# Altium PCB PCB1.PcbDoc
Units mil, origin at the board's own origin, x right, y up, seen from the top; angles counter-clockwise.
Board outline not stored, 2 copper layers (Top Layer, Bottom Layer); 79 components, 65 nets, 339 pads, 0 vias.
Unrouted connection lines stored in the file: 203.
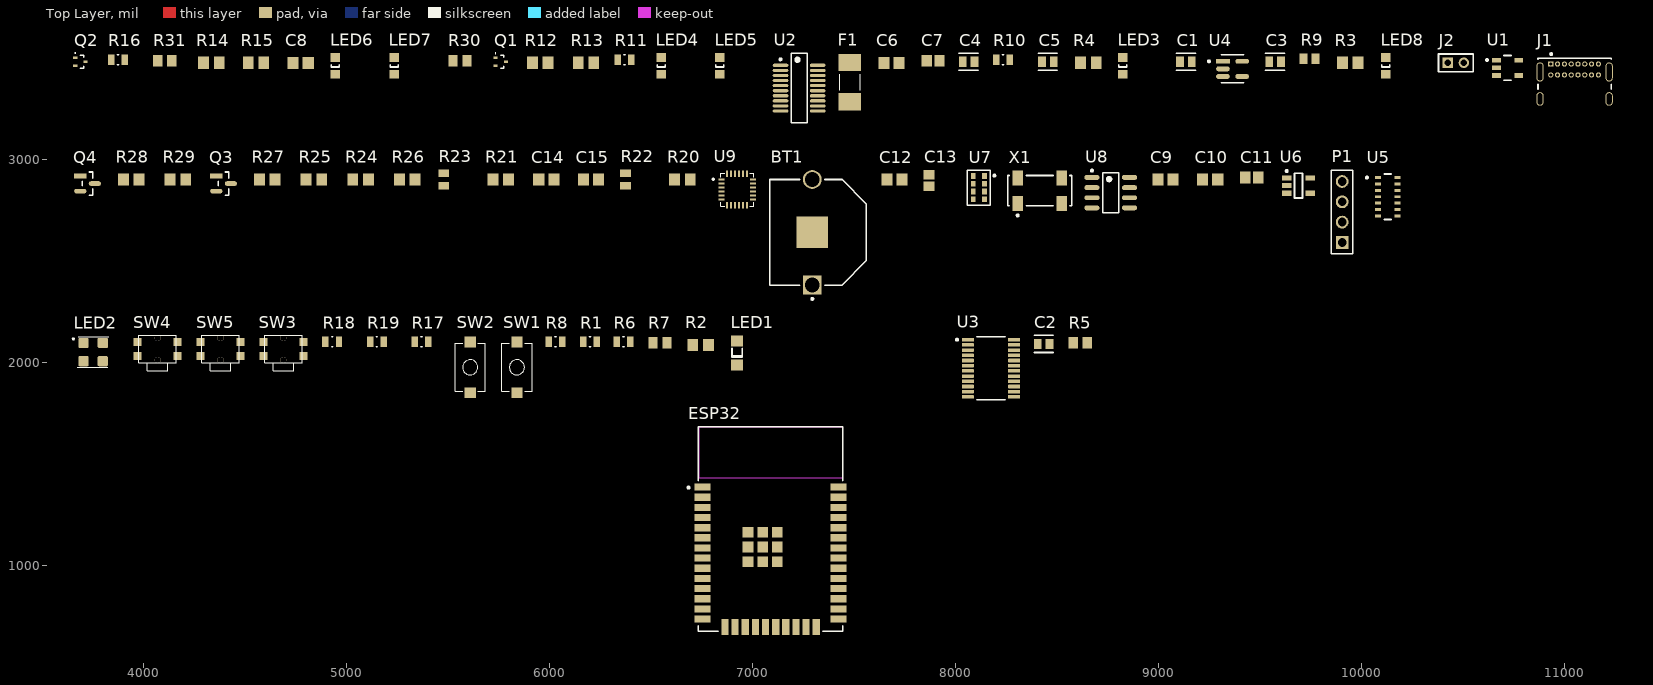
[diagram p0: Top Layer view]
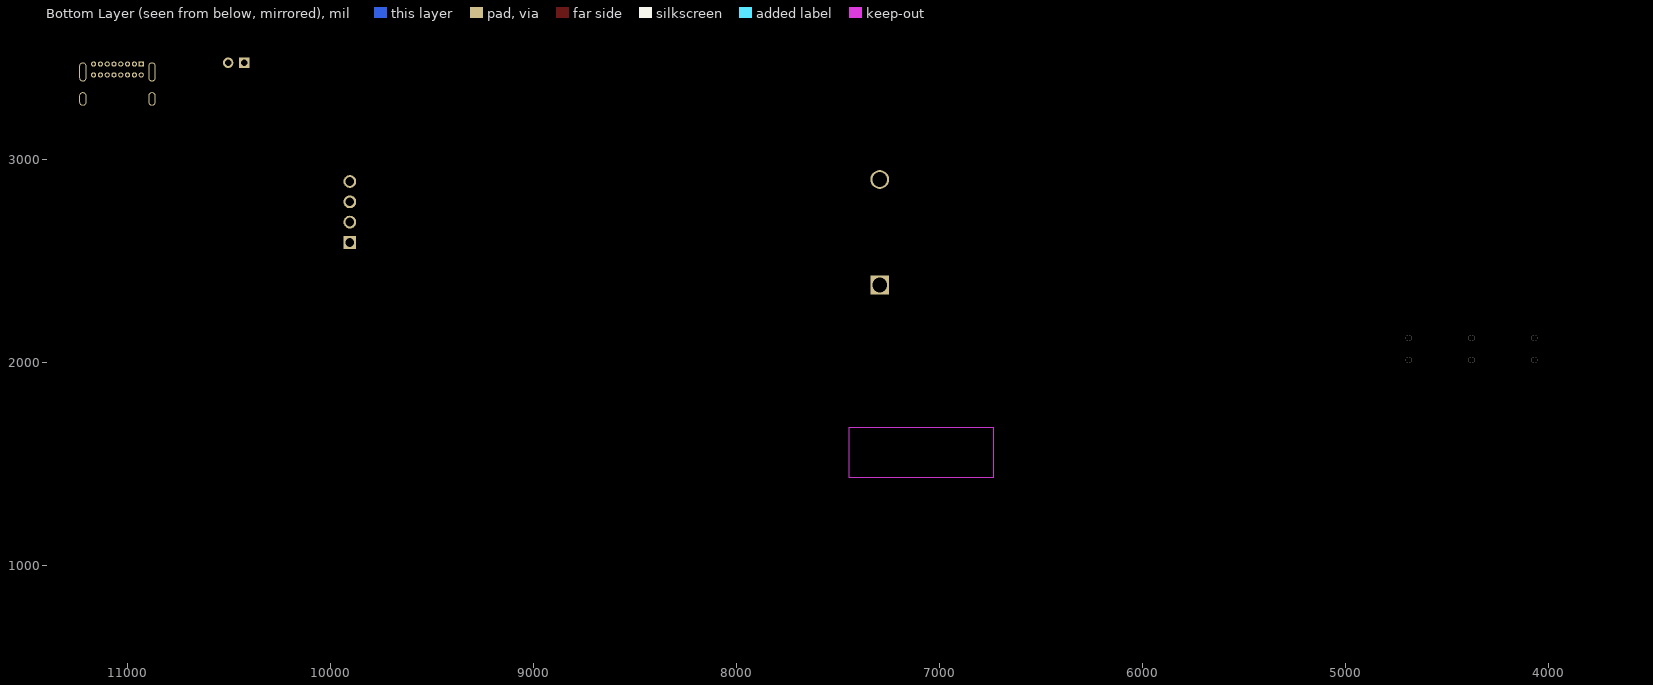
[diagram p1: Bottom Layer view, seen from below]

## Layer stack, top to bottom
Top Solder: solder mask 0.4, Solder Resist, Dk 3.5
Top Layer: signal copper 1.4
Dielectric 1: dielectric 12.6, FR-4, Dk 4.8
Bottom Layer: signal copper 1.4
Bottom Solder: solder mask 0.4, Solder Resist, Dk 3.5

## Design rules (kind name [scope] priority, off if disabled: settings)
Clearance [All] p1: gap=10 ignorepadtopadclearanceinfootprint=FALSE except(0: Arc-Hole Track-Hole SMDPad-Hole THPad-Hole Via-Hole Fill-Hole Poly-Hole Region-Hole Text-Hole)
PolygonConnect [All] p1: connectstyle=Relief reliefconductorwidth=10 reliefentries=4 polygonreliefangle="90 Angle" airgapwidth=10
RoutingVias [All] p1: holewidth=28 width=50 viastyle="Through Hole" minholewidth=28 minwidth=50 maxholewidth=28 maxwidth=50
SolderMaskExpansion [All] p1: expansion=4 istentingtop=FALSE
Width [All] p1: maxlimit=10 minlimit=10 preferedwidth=10
30 further rules are at their usual default settings.

## Components (designator, comment, footprint, x,y, rotation, side; value= is the part's Value field where it differs from the comment)
BT1 "3001" KSTN-3001_V 7295,2641.61 r90 top
C1 "10uf" FP-GRM21B-0_1-IPC_C 9135,3481.61 r0 top
C2 "10uf" FP-GRM21B-0_1-IPC_C 8435,2091.61 r0 top
C3 "10uf" FP-GRM21B-0_1-IPC_C 9575,3481.61 r0 top
C4 "10uf" FP-GRM21B-0_1-IPC_C 8065,3481.61 r0 top
C5 "10uf" FP-GRM21B-0_1-IPC_C 8455,3481.61 r0 top
C6 "0.1uf" CAPC2013X135X45ML10T25 7685,3476.61 r0 top
C7 "4.7uf" CAPC2013X140X50NL20T25 7890,3486.61 r0 top
C8 "0.1uf" CAPC2013X135X45ML10T25 4775,3476.61 r0 top
C9 "0.1uf" CAPC2013X135X45ML10T25 9035,2901.61 r0 top
C10 "0.1uf 0805" CAPC2013X135X45ML10T25 9255,2901.61 r0 top
C11 "4.7uf 0805" CAPC2013X140X50NL20T25 9460,2911.61 r0 top
C12 "0.1uf" CAPC2013X135X45ML10T25 7700,2901.61 r0 top
C13 "2.2nF 5% 0805" CAPC2013X94X50LL20T25 7870,2896.61 r90 top
C14 "0.1uf 10% 0805" CAPC2013X135X45ML10T25 5985,2901.61 r0 top
C15 "0.1uf 10% 0805" CAPC2013X135X45ML10T25 6205,2901.61 r0 top
ESP32 "ESP32-WROOM-32D" FP-ESP32-WROOM-32D-MFG 7089.65,1179.53 r0 top
F1 "500mA 125VAC/DC" FUSE 7480,3381.61 r90 top
J1 "USB4085-GF-A" FP-USB4085-GF-A-MFG 11050,3311.61 r0 top
J2 "M22-2510205" FP-M22-2510205-MFG 10465,3476.61 r0 top
LED1 "150120GS75000_GREEN" 1206_A 6925,2046.61 r90 top
LED2 "4492" "LED adafruit" 3755,2051.61 r0 top
LED3 "150080GS75000_GREEN" 0805_A 8825,3461.61 r90 top
LED4 "150080GS75000_GREEN" 0805_A 6550,3461.61 r90 top
LED5 "150080GS75000_GREEN" 0805_A 6840,3461.61 r90 top
LED6 "150080GS75000_GREEN" 0805_A 4945,3461.61 r90 top
LED7 "150080GS75000_GREEN" 0805_A 5235,3461.61 r90 top
LED8 "150080SS75000_RED" 0805_A 10120,3461.61 r90 top
P1 "OLED SCREEN HEADER" 61300411121 9905,2741.61 r90 top
Q1 "MMBT2222ATT1G" ONSC-SC-75-3-463-01_V 5760,3481.61 r0 top
Q2 "MMBT2222ATT1G" ONSC-SC-75-3-463-01_V 3690,3481.61 r0 top
Q3 "BSS138" FP-318-08-IPC_B 4395,2881.61 r0 top
Q4 "BSS138" FP-318-08-IPC_B 3725,2881.61 r0 top
R1 "10K 5% 0805" FP-CRCW0805-e3-IPC_C 6200,2101.61 r0 top
R2 "1K 0805" RESC2013X70X40ML20T20 6745,2086.61 r0 top
R3 "470ohm" RESC2013X70X40ML20T20 9945,3476.61 r0 top
R4 "470ohm" RESC2013X70X40ML20T20 8655,3476.61 r0 top
R5 "1.5K 5% 0805" RESC2013X70X40NL20T20 8615,2096.61 r0 top
R6 "10K 5% 0805" FP-CRCW0805-e3-IPC_C 6365,2101.61 r0 top
R7 "1.5K 5% 0805" RESC2013X70X40NL20T20 6545,2096.61 r0 top
R8 "10K 5% 0805" FP-CRCW0805-e3-IPC_C 6030,2101.61 r0 top
R9 "1.5Kohm" RESC2013X60X40LL20T25 9745,3496.61 r0 top
R10 "10K 5% 0805" FP-CRCW0805-e3-IPC_C 8235,3491.61 r0 top
R11 "10K 5% 0805" FP-CRCW0805-e3-IPC_C 6370,3491.61 r0 top
R12 "330ohm 5% 0805" RESC2013X70X40ML20T20 5955,3476.61 r0 top
R13 "1K 0805" RESC2013X70X40ML20T20 6180,3476.61 r0 top
R14 "330ohm 5% 0805" RESC2013X70X40ML20T20 4335,3476.61 r0 top
R15 "1K 0805" RESC2013X70X40ML20T20 4555,3476.61 r0 top
R16 "10K 5% 0805" FP-CRCW0805-e3-IPC_C 3875,3491.61 r0 top
R17 "10K 5% 0805" FP-CRCW0805-e3-IPC_C 5370,2101.61 r0 top
R18 "10K 5% 0805" FP-CRCW0805-e3-IPC_C 4930,2101.61 r0 top
R19 "10K 5% 0805" FP-CRCW0805-e3-IPC_C 5150,2101.61 r0 top
R20 "4.7K 5% 0805" RESC2013X70X40ML20T20 6655,2901.61 r0 top
R21 "4.7K 5% 0805" RESC2013X70X40ML20T20 5760,2901.61 r0 top
R22 "2.2K 5% 0805" RESC2013X70X40LL20T20 6375,2901.61 r90 top
R23 "2.2K 5% 0805" RESC2013X70X40LL20T20 5480,2901.61 r90 top
R24 "4.7K 5% 0805" RESC2013X70X40ML20T20 5070,2901.61 r0 top
R25 "4.7K 5% 0805" RESC2013X70X40ML20T20 4840,2901.61 r0 top
R26 "4.7K 5% 0805" RESC2013X70X40ML20T20 5300,2901.61 r0 top
R27 "4.7K 5% 0805" RESC2013X70X40ML20T20 4610,2901.61 r0 top
R28 "4.7K 5% 0805" RESC2013X70X40ML20T20 3940,2901.61 r0 top
R29 "4.7K 5% 0805" RESC2013X70X40ML20T20 4170,2901.61 r0 top
R30 "5.1Kohm 5% 0805" RESC2013X70X40NL20T20 5560,3486.61 r0 top
R31 "5.1Kohm 5% 0805" RESC2013X70X40NL20T20 4105,3486.61 r0 top
SW1 "RESET_BUTTON" 434113025826 5840,1976.61 r90 top
SW2 "BOOT_BUTTON" 434113025826 5610,1976.61 r90 top
SW3 "436353045816" 436353045816 4690,2066.61 r0 top
SW4 "436353045816" 436353045816 4070,2066.61 r0 top
SW5 "436353045816" 436353045816 4380,2066.61 r0 top
U1 "MCP73832T-2ACI/OT" FP-C04-091-OT-MFG 10720,3451.61 r0 top
U2 "FT231XS-U" SSOP-20_L 7230,3351.61 r0 top
U3 "TCA9548APWR" FP-PW0024A-MFG 8175,1971.61 r0 top
U4 "AP2112K-3.3TRG1" FP-SOT25-IPC_A 9365,3446.61 r0 top
U5 "MAX30102EFD+" FP-F143A5-1-MFG 10130,2816.61 r0 top
U6 "LP2985-18DBVR" DBV0005A_M 9690,2871.61 r0 top
U7 "APDS-9960" FP-APDS-9960-MFG 8115,2861.61 r0 top
U8 "DS1307Z+" S8+2_L 8765,2836.61 r0 top
U9 "MPU-6050" MPU-6050 6925,2856.61 r0 top
X1 "32.768KHZ" ABRA-ABS25-4_V 8415,2846.61 r0 top

## Footprints (in the part's own frame and the unit in brackets; to place one, negate y for a bottom-side part, rotate by r counter-clockwise, add the part's x,y. Pads: shape width x height; smd on the part's side, far side on the other; paste and mask are expansions set on the pad)
0805_A [mm] "Chip LED, 2-Leads, Body 2.0x1.3mm, IPC Medium Density"
  rect 1.1x1.2 smd: 1(-1.05,0) 2(1.05,0)
  silkscreen extent -0.15,-0.5 0.15,0.5, body extent -1,-0.62 1,0.63, height 0.68
1206_A [mm] "Chip LED, 2-Leads, Body 3.2x1.6mm, IPC Medium Density"
  rect 1.4x1.5 smd: 1(-1.5,0) 2(1.5,0)
  silkscreen extent -0.5,-0.67 0.6,0.65, body extent -1.6,-0.8 1.6,0.8, height 0.68
61300411121 [mm] "Pin Header, pitch 2.54 mm, THT, Vertical, single row, 4p"
  rect 1.6x1.6 hole 1.1: 1(-3.81,0)
  round 1.6 hole 1.1: 2(-1.27,0) 3(1.27,0) 4(3.81,0)
  silkscreen extent -5.23,-1.35 5.23,1.35, body extent -5.08,-1.27 5.08,1.27, height 8.57
434113025826 [mm] "6.0*3.8mm vertical type, J-Bend SMD, height 2.5mm, white actuator, 260gf, T&R"
  rect 1.35x1.4 smd: 1(-3.175,0) 2(3.175,0)
  silkscreen extent -3,-1.9 3,1.9, body extent -3.5,-1.95 3.5,1.95, height 2.5
436353045816 [mm] "4.7*3.5mm side push type, J-Bend SMD with boss design,  height 1.65mm, white actuator, 160gf, T&R"
  rect 1x1 smd: 1(2.5,0.85) 2(2.5,-0.85) 3(-2.5,0.85) 4(-2.5,-0.85)
  round 0.75 hole 0.75 unplated: ""(0,-1.375) ""(0,1.375)
  silkscreen extent -2.35,-2.75 2.35,1.75, body extent -2.75,-2.75 2.75,1.75, height 1.65
ABRA-ABS25-4_V [mm] "SMD, 4-Leads, Body 8x3.8mm, Pitch 5.5mm, Height 2.5mm"
  rect 1.3x1.9 smd: 1(-2.75,-1.6) 2(2.75,-1.6) 3(2.75,1.6) 4(-2.75,1.6)
  silkscreen extent -4,-3.22 4,1.9, body extent -4,-2 4,2, height 2.66
CAPC2013X94X50LL20T25 [mm] "Chip Capacitor, 2-Leads, Body 2.01x1.25mm, IPC High Density"
  rect 1.15x1.35 smd: 1(-0.725,0) 2(0.725,0)
  body extent -1.1,-0.72 1.1,0.72, height 0.94
CAPC2013X135X45ML10T25 [mm] "Chip Capacitor, 2-Leads, Body 2.10x1.35mm, IPC Low Density"
  rect 1.4x1.5 smd: 1(-0.95,0) 2(0.95,0)
  body extent -1.05,-0.67 1.05,0.67, height 1.35
CAPC2013X140X50NL20T25 [mm] "Chip Capacitor, 2-Leads, Body 2.00x1.25mm, IPC Medium Density"
  rect 1.3x1.45 smd: 1(-0.8,0) 2(0.8,0)
  body extent -1.1,-0.72 1.1,0.72, height 1.4
DBV0005A_M [mm] "SOT23, 5-Leads, Body 3.05x1.75mm, Pitch 0.95mm, IPC Low Density"
  rrect15% 1.2x0.65 smd: 1(-1.475,0.95) 2(-1.475,0) 3(-1.475,-0.95) 4(1.475,-0.95) 5(1.475,0.95)
  silkscreen extent -1.6,-1.55 0.5,1.95, body extent -1.42,-1.46 1.42,1.46, height 1.08
FP-318-08-IPC_B [mm]
  rect 1.524x0.578 smd paste+0 mask+0: 1(-0.91,0.95)
  rrect100% 1.524x0.578 smd paste+0 mask+0: 2(-0.91,-0.95) 3(0.91,0)
  silkscreen extent -0.65,-1.45 0.65,1.45, body extent -1.92,-1.7 1.92,1.7, height 0.25
FP-APDS-9960-MFG [mm]
  rect 0.6x0.72 smd paste+0 mask+0: 1(0.7,1.455) 2(0.7,0.485) 3(0.7,-0.485) 4(0.7,-1.455) 5(-0.7,-1.455) 6(-0.7,-0.485) 7(-0.7,0.485) 8(-0.7,1.455)
  silkscreen extent -1.42,-2.19 2.07,2.19, body extent -1.38,-2.17 1.38,2.17, height 0.25
FP-C04-091-OT-MFG [mm]
  rect 1.1x0.6 smd paste+0 mask+0: 1(-1.4,0.95) 2(-1.4,0) 3(-1.4,-0.95) 4(1.4,-0.95) 5(1.4,0.95)
  silkscreen extent -2.7,-1.55 0.48,1.55, body extent -2.05,-1.9 2.05,1.9, height 0.25
FP-CRCW0805-e3-IPC_C [mil]
  rect 31.75x51.5 smd paste+0 mask+0: 1(-33.5,0) 2(33.5,0)
  silkscreen extent -3,-25 3,25, body extent -53,-31 53,31, height 10
FP-ESP32-WROOM-32D-MFG [mm]
  rect 2x0.9 smd paste+0 mask+0: 1(-8.5,5.26) 2(-8.5,3.99) 3(-8.5,2.72) 4(-8.5,1.45) 5(-8.5,0.18) 6(-8.5,-1.09) 7(-8.5,-2.36) 8(-8.5,-3.63) 9(-8.5,-4.9) 10(-8.5,-6.17) 11(-8.5,-7.44) 12(-8.5,-8.71) 13(-8.5,-9.98) 14(-8.5,-11.25) 25(8.5,-11.25) 26(8.5,-9.98) 27(8.5,-8.71) 28(8.5,-7.44) 29(8.5,-6.17) 30(8.5,-4.9) 31(8.5,-3.63) 32(8.5,-2.36) 33(8.5,-1.09) 34(8.5,0.18) 35(8.5,1.45) 36(8.5,2.72) 37(8.5,3.99) 38(8.5,5.26)
  rect 0.9x2 smd paste+0 mask+0: 15(-5.715,-12.25) 16(-4.445,-12.25) 17(-3.175,-12.25) 18(-1.905,-12.25) 19(-0.635,-12.25) 20(0.635,-12.25) 21(1.905,-12.25) 22(3.175,-12.25) 23(4.445,-12.25) 24(5.715,-12.25)
  rect 1.33x1.33 smd paste+0 mask+0: 39(-2.835,-4.075) 39(-2.835,-2.24) 39(-2.835,-0.405) 39(-1,-4.075) 39(-1,-2.24) 39(-1,-0.405) 39(0.835,-4.075) 39(0.835,-2.24) 39(0.835,-0.405)
  Keep-Out Layer region: -9,6.45 9,6.45 9,12.75 -9,12.75
  Keep-Out Layer region: -9,6.45 9,6.45 9,12.75 -9,12.75
  silkscreen extent -10.4,-12.8 9.05,12.8, body extent -9.6,-13.35 9.6,12.9, height 0.25
FP-F143A5-1-MFG [mm]
  rect 0.75x0.35 smd paste+0 mask+0: 1(-1.2,2.4) 2(-1.2,1.6) 3(-1.2,0.8) 4(-1.2,0) 5(-1.2,-0.8) 6(-1.2,-1.6) 7(-1.2,-2.4) 8(1.2,-2.4) 9(1.2,-1.6) 10(1.2,-0.8) 11(1.2,0) 12(1.2,0.8) 13(1.2,1.6) 14(1.2,2.4)
  silkscreen extent -2.75,-2.85 0.45,2.85, body extent -2.2,-3.35 2.2,3.35, height 0.25
FP-GRM21B-0_1-IPC_C [mil]
  rect 37.71x49.69 smd paste+0 mask+0: 1(-28.63,0) 2(28.63,0)
  silkscreen extent -47,-42 47,42, body extent -51,-31 51,31, height 10
FP-M22-2510205-MFG [mm]
  rect 1.3x1.3 hole 0.8 paste-1000 mask+0: 1(-1,0)
  round 1.3 hole 0.8 paste-1000 mask+0: 2(1,0)
  silkscreen extent -2.17,-1.1 2.17,1.1, body extent -2.27,-1.2 2.27,1.2, height 0.25
FP-PW0024A-MFG [mm]
  rrect22% 1.5x0.45 smd paste+0 mask+0: 1(-2.9,3.575) 2(-2.9,2.925) 3(-2.9,2.275) 4(-2.9,1.625) 5(-2.9,0.975) 6(-2.9,0.325) 7(-2.9,-0.325) 8(-2.9,-0.975) 9(-2.9,-1.625) 10(-2.9,-2.275) 11(-2.9,-2.925) 12(-2.9,-3.575) 13(2.9,-3.575) 14(2.9,-2.925) 15(2.9,-2.275) 16(2.9,-1.625) 17(2.9,-0.975) 18(2.9,-0.325) 19(2.9,0.325) 20(2.9,0.975) 21(2.9,1.625) 22(2.9,2.275) 23(2.9,2.925) 24(2.9,3.575)
  silkscreen extent -4.37,-3.95 1.78,3.95, body extent -3.75,-4.2 3.75,4.2, height 0.25
FP-SOT25-IPC_A [mm]
  rect 1.707x0.616 smd paste+0 mask+0: 1(-1.201,0.95)
  rrect100% 1.707x0.616 smd paste+0 mask+0: 2(-1.201,0) 3(-1.201,-0.95) 4(1.201,-0.95) 5(1.201,0.95)
  silkscreen extent -3.08,-1.75 1.4,1.75, body extent -2.55,-2 2.55,2, height 0.25
FP-USB4085-GF-A-MFG [mm]
  rrect100% 0.9x2.4 hole 2.1 slot 0.6 at 0 deg paste-1000 mask+0: 1(-4.325,3.045) 2(4.325,3.045)
  rrect100% 0.9x1.7 hole 1.4 slot 0.6 at 0 deg paste-1000 mask+0: 3(-4.325,-0.335) 4(4.325,-0.335)
  rect 0.65x0.65 hole 0.4 paste-1000 mask+0: A1(-2.975,4.025)
  round 0.65 hole 0.4 paste-1000 mask+0: A4(-2.125,4.025) A5(-1.275,4.025) A6(-0.425,4.025) A7(0.425,4.025) A8(1.275,4.025) A9(2.125,4.025) A12(2.975,4.025) B1(2.975,2.675) B4(2.125,2.675) B5(1.275,2.675) B6(0.425,2.675) B7(-0.425,2.675) B8(-1.275,2.675) B9(-2.125,2.675) B12(-2.975,2.675)
  silkscreen extent -4.57,0.89 4.57,5.39, body extent -4.87,-4.83 4.87,4.83, height 0.25
FUSE [mm]
  rect 2.15x2.8 smd: 1(-2.455,0) 2(2.455,0)
  silkscreen extent -1,-1.27 1,1.27, body extent -3.05,-1.27 3.05,1.27, height 2.79
KSTN-3001_V [mm] "THD, 2-Leads, Body 13.21x12.07mm"
  rect 2.35x2.35 hole 1.85: 1(-6.605,0)
  round 2.35 hole 1.85: 2(6.605,0)
  rect 3.96x3.96 smd: 3(0,0)
  silkscreen extent -8.45,-6.73 6.61,5.34, body extent -6.61,-6.73 6.61,5.34, height 3
"LED adafruit" [mil]
  rrect25% 50x50 smd: 1(-50,45) 2(-50,-45) 3(45,-45) 4(45,45)
  silkscreen extent -104,-75 75,75
MPU-6050 [mm]
  rect 0.79x0.26 smd: 1(-1.97,1.123) 2(-1.97,0.623) 3(-1.97,0.123) 4(-1.97,-0.377) 5(-1.97,-0.877) 6(-1.97,-1.377) 13(1.97,-1.377) 14(1.97,-0.877) 15(1.97,-0.377) 16(1.97,0.123) 17(1.97,0.623) 18(1.97,1.123)
  rect 0.26x0.79 smd: 7(-1.25,-2.097) 8(-0.75,-2.097) 9(-0.25,-2.097) 10(0.25,-2.097) 11(0.75,-2.097) 12(1.25,-2.097) 19(1.25,1.843) 20(0.75,1.843) 21(0.25,1.843) 22(-0.25,1.843) 23(-0.75,1.843) 24(-1.25,1.843)
  silkscreen extent -3.1,-2.18 2.05,1.92, body extent -2,-2.13 2,1.87, height 0.94
ONSC-SC-75-3-463-01_V [mil] "SOT23, 3-Leads, Body 1.6x0.8mm, Pitch 0.5mm"
  rect 20x14.02 smd: 1(-25.49,19.69) 2(-25.49,-19.69) 3(25.49,0)
  silkscreen extent -27,-31 16,44, body extent -16,-31 16,31, height 35
RESC2013X60X40LL20T25 [mm] "Chip Resistor, 2-Leads, Body 2.00x1.25mm, IPC High Density"
  rect 1x1.35 smd: 1(-0.75,0) 2(0.75,0)
  body extent -1.1,-0.72 1.1,0.72, height 0.6
RESC2013X70X40LL20T20 [mm] "Chip Resistor, 2-Leads, Body 2.00x1.25mm, IPC High Density"
  rect 0.95x1.35 smd: 1(-0.775,0) 2(0.775,0)
  body extent -1.1,-0.72 1.1,0.72, height 0.7
RESC2013X70X40ML20T20 [mm] "Chip Resistor, 2-Leads, Body 2.00x1.25mm, IPC Low Density"
  rect 1.35x1.55 smd: 1(-0.975,0) 2(0.975,0)
  body extent -1.1,-0.72 1.1,0.72, height 0.7
RESC2013X70X40NL20T20 [mm] "Chip Resistor, 2-Leads, Body 2.00x1.25mm, IPC Medium Density"
  rect 1.15x1.45 smd: 1(-0.875,0) 2(0.875,0)
  body extent -1.1,-0.72 1.1,0.72, height 0.7
S8+2_L [mm] "SOIC, 8-Leads, Body 4.9x3.9mm, Pitch 1.27mm, IPC High Density"
  oval 1.9x0.6 smd: 1(-2.35,1.905) 2(-2.35,0.635) 3(-2.35,-0.635) 4(-2.35,-1.905) 5(2.35,-1.905) 6(2.35,-0.635) 7(2.35,0.635) 8(2.35,1.905)
  silkscreen extent -2.47,-2.5 1,2.88, body extent -2,-2.5 2,2.5, height 1.75
SSOP-20_L [mm] "SOP, 20-Leads, Body 8.6x3.9mm, Pitch 0.635mm, IPC High Density"
  oval 1.95x0.4 smd: 1(-2.325,2.857) 2(-2.325,2.222) 3(-2.325,1.587) 4(-2.325,0.953) 5(-2.325,0.318) 6(-2.325,-0.318) 7(-2.325,-0.953) 8(-2.325,-1.587) 9(-2.325,-2.222) 10(-2.325,-2.857) 11(2.325,-2.857) 12(2.325,-2.222) 13(2.325,-1.587) 14(2.325,-0.953) 15(2.325,-0.318) 16(2.325,0.318) 17(2.325,0.953) 18(2.325,1.587) 19(2.325,2.222) 20(2.325,2.857)
  silkscreen extent -2.45,-4.35 1,4.35, body extent -1.99,-4.37 1.99,4.37, height 1.76

## Part data
BT1: library part CMP-2000-05463-1, "Holder Battery Coin, 12 mm, 2-Pin THD, RoHS", Manufacturer=Keystone, Package Description="2-Pin Through Hole Device, Body 13.21 x 12.07 mm", Datasheet URL=https://datasheet.ciiva.com/3/3001-3954.pdf, Datasheet Version="Rev. H, 09/2006", Manufacturer URL=http://www.keyelco.com/, Mounting Technology=ThroughHole, Package Reference=3001
C1 C2 C3 C4 C5: library part CMP-2007-03453-2, "Chip Multilayer Ceramic Capacitors for General Purpose, 0805, 10uF, X5R, 15%, 10%, 16V", Capacitance=10uF, Case Code (Imperial)=0805, Case Code (Metric)=2012, Dielectric=X5R, Max Operating Temperature=85°C, Min Operating Temperature=-55°C, Package Quantity=1, Tolerance=10%, Voltage=16V, Case/Package=0805, Depth=1.25mm, Height=1.25mm, Lead Free="Lead Free", Length=2mm, Material=Ceramic, Mount="Surface Mount", Packaging="Tape and Reel", Radiation Hardening=No, REACH SVHC="No SVHC", Termination=SMD/SMT, Thickness=0.053inch, Voltage Rating=16V, Voltage Rating (DC)=16V, Width=1.25mm
C6 C8 C9 C10 C12 C14 C15: library part CMP-2100-03644-1, "Chip Capacitor, 0.1 uF, +/- 10%, 50 V, -55 to 125 degC, 0805 (2012 Metric), RoHS, Tape and Reel", Capacitance=100nF, Case Code (Imperial)=0805, Case Code (Metric)=2012, Dielectric=X7R, Dielectric Material=Ceramic, Insulation Resistance=10GR, Manufacturer=Murata, Max Operating Temperature=125degC, Min Operating Temperature=-55degC, Package Description="2-Pin Surface Mount Device, Body 2 x 1.25 mm", Package Quantity=1, Tolerance=10%, Voltage=50V, Case/Package=0805, Datasheet URL=http://psearch.en.murata.com/capacitor/product/GRM21BR71H104KA01%23.pdf, Datasheet Version=42675.0, Depth=1.25mm, Height=1.25mm, Lead Free=LeadFree, Length=2mm, Manufacturer URL=http://www.murata.com/, Material=Ceramic, Mount=SurfaceMount, Number of Pins=2, Package Reference=0805, Packaging=TapeandReel, Radiation Hardening=No, REACH SVHC=Unknown, RoHSCompliant=true, Termination=SMD/SMT, Thickness=0.053inch, Voltage Rating=50V, Voltage Rating (DC)=50V, Width=0.049inch
C7 C11: library part CMP-2007-04614-1, Manufacturer="AVX Interconnect / Elco", Part Number=08053D475KAT2A
C13: library part CMP-2007-04184-1, Manufacturer="AVX Interconnect / Elco", Part Number=08051C222JAT2A
ESP32: library part CMP-194065-000003-1, "WIFI MODULE 32MBITS SPI FLASH", Manufacturer="Espressif Systems", Max Frequency=2484MHz, Max Supply Voltage=3.6V, Min Supply Voltage=3V, Nominal Supply Current=500mA, Temperature="-40°C to +85°C", Temperature Range High=+85°C, Temperature Range Low=-40°C, Automotive=No, Bandwidth=72MHz, Category=UNK, ComponentLink2Description=Datasheet, ComponentLink2URL=https://www.espressif.com/sites/default/files/documentation/esp32-wroom-32d_esp32-wroom-32u_datasheet_en.pdf, Data Rate=150Mbits/s, Device Class L1="Integrated Circuits (ICs)", Device Class L2="RF Semiconductors and Devices", Device Class L3=Transceivers, Digikey Description="WIFI MODULE 32MBITS SPI FLASH", Height=3.2mm, Interface=I2C,SPI,UART,Ethernet,I2S,Other, Lead Free=Yes, Manufacturer Part Number=ESP32-WROOM-32D, Mouser Description="Wi-Fi/BT BLE Module ESP32-D0WD, SPI Flash, UART, P", Number Of Adc Channels=16, Number Of Gpio=32, Octopart=https://octopart.com/esp32-wroom-32d-espressif+systems-91040050, Package=ESP32-WROOM-32D, RoHS=TRUE, Sensitivity=-98dBm
F1: library part 0679L0500-05, "Fuse Brd Mnt 500MA 125VAC/VDC", Case Code (Imperial)=2410, Case Code (Metric)=6125, Current Rating=500mA, DC Cold Resistance=240mR, Manufacturer=Bel, Max Operating Temperature=125°C, Min Operating Temperature=-55°C, Supplier Part Number 1=507-1983-1-ND, Voltage Rating (AC)=125V, Approvals=cURus, Case/Package=2410, Category=Fuses, ComponentLink1Description=http://www.belfuse.com/resources/CircuitProtection/datasheets/0679L%20Sep2016.pdf?src-supplier=Digi-Key, ComponentLink1URL=http://www.belfuse.com/resources/CircuitProtection/datasheets/0679L%20Sep2016.pdf?src-supplier=Digi-Key, Fuse Type="Board Mount (Cartridge Style Excluded)", Height=0.11inch, Length=0.24inch, Manufacturer Part Number=0679L0500-05, Mount="Surface Mount", Packaging="Tape and Reel", Pricing 1="1=0.32000, 5=0.31000, 10=0.29600, 50=0.26400, 100=0.24570, 250=0.21840, 500=0.18200, 1000=0.17290 (USD)", RoHS=Yes, Stock 1=4711, Supplier 1=Digi-Key, Voltage Rating (DC)=125V, Width=0.1inch
J1: library part CMP-196119-000001-1, "CONN RCPT USB2.0 TYPEC 16POS", Current Rating=4.25A, Manufacturer="Global Connector Technology", Package=0, Temperature="-40°C to +85°C", Temperature Range High=+85°C, Temperature Range Low=-40°C, Voltage Rating=20V, Automotive=No, Category=Conn, ComponentLink2Description=Datasheet, ComponentLink2URL=https://gct.co/files/drawings/usb4085.pdf, Conn Orientation="Right Angle", Contact Material=Gold,Nickel, Device Class L1=Connectors, Device Class L2="USB Connectors", Device Class L3=unset, Digikey Description="CONN RCPT USB2.0 TYPEC 16POS", Height=3.66mm, Is Female=yes, Lead Free=Yes, Manufacturer Part Number=USB4085-GF-A, Number Of Contacts=16, Octopart=https://octopart.com/usb4085-gf-a-global+connector+technology-94773699, Pitch=0.85mm, RoHS=TRUE, Shielding=true, Usb Standard="USB 2.0"
J2: library part CMP-15831-000005-1, "CONN HEADER VERT 2POS 2MM", Current Rating=2A, Manufacturer=Harwin, Package=0, Temperature="-40°C to +105°C", Temperature Range High=+105°C, Temperature Range Low=-40°C, Automotive=No, Category=Conn, ComponentLink2Description=Datasheet, ComponentLink2URL=https://cdn.harwin.com/pdfs/C018XX_M22_Series_Connectors.pdf, Conn Gender=Male, Conn Orientation=Vertical, Contact Material=Gold,Nickel, Device Class L1=Connectors, Device Class L2="Headers and Wire Housings", Device Class L3=unset, Digikey Description="CONN HEADER VERT 2POS 2MM", Footprint Url=https://cdn.harwin.com/pdfs/M22-251.pdf, Height=5.45mm, Lead Free=Yes, Manufacturer Part Number=M22-2510205, Mouser Description="Headers & Wire Housings 2 PIN SIL VERTICAL GOLD PIN HEADER", Number Of Contacts=2, Number Of Rows=1, Octopart=https://octopart.com/m22-2510205-harwin-2538221, Pitch=2mm, RoHS=TRUE
LED1: library part CMP-1426-00014-1, "SMD mono-color Chip LED, WL-SMCW, Green", Color=Green, Manufacturer="Wuerth Elektronik", PartNumber=150120GS75000, ComponentLink1Description="Manufacturer URL", ComponentLink1URL=http://www.we-online.com, ComponentLink2Description=Datasheet, ComponentLink2URL=http://katalog.we-online.com/led/datasheet/150120GS75000.pdf, PackageReference=1206_A
LED2: Manufacturer="Adafruit Industries", Supplier Part Number 1=54AH5116, Manufacturer Part Number=4492, Pricing 1="1=3.95000 (USD)", RoHS=No, Supplier 1=Newark
LED3 LED4 LED5 LED6 LED7: library part CMP-1426-00007-1, "SMD mono-color Chip LED, WL-SMCW, Green", Color=Green, Manufacturer="Wuerth Elektronik", PartNumber=150080GS75000, ComponentLink1Description="Manufacturer URL", ComponentLink1URL=http://www.we-online.com, ComponentLink2Description=Datasheet, ComponentLink2URL=http://katalog.we-online.com/led/datasheet/150080GS75000.pdf, PackageReference=0805_A
LED8: library part CMP-1426-00010-1, "SMD mono-color Chip LED, WL-SMCW, Super Red", Color="Super Red", Manufacturer="Wuerth Elektronik", PartNumber=150080SS75000, ComponentLink1Description="Manufacturer URL", ComponentLink1URL=http://www.we-online.com, ComponentLink2Description=Datasheet, ComponentLink2URL=http://katalog.we-online.com/led/datasheet/150080SS75000.pdf, PackageReference=0805_A
P1: library part CMP-1502-01064-1, "THT Vertical Pin Header WR-PHD, Pitch 2.54 mm, Single Row, 4 pins", Contact Resistance=20mOhm, Manufacturer="Wurth Elektronik", Operating Temperature=-40to105degC, Package Reference=61300411121, Rated Current=3A, Withstanding Voltage=500VAC, Working Voltage=250VAC, Datasheet URL=https://katalog.we-online.de/em/datasheet/6130xx11121.pdf, Gender=Male, Manufacturer URL=http://www.we-online.de, Mounting Technology=THT, Orientation=Vertical, Packaging=Bag, Part Number=61300411121, Pin Number=4, Pitch=2.54mm, Publisher=WurthElektronik, Row Number=Single
Q1 Q2: library part CMP-1048-00417-1, "General Purpose Transistor, NPN Silicon, 3-Pin SC-75, Pb-Free, Tape and Reel", Manufacturer="On Semiconductor", ComponentLink1Description="Manufacturer URL", ComponentLink1URL=http://www.onsemi.com/, ComponentLink2Description=Datasheet, ComponentLink2URL=http://www.onsemi.cn/pub_link/Collateral/MMBT2222ATT1-D.PDF, ComponentLink3Description="Package Specification", ComponentLink3URL=http://www.onsemi.com/pub_link/Collateral/463-01.PDF, DatasheetVersion="Rev. 5", fT Min (MHz)=300, IC Continuous (A)=0.6, Mounting Technology="Surface Mount", PackageDescription="3-Pin Small Outline Transistor, Body 1.6 x 0.8 mm, Pitch 0.5 mm", PackageReference=SC-75-3-463-01, PackageVersion="Rev. F, 07/2005", Packing="Tape and Reel", PartNumber=MMBT2222ATT1G, Polarity=NPN, RoHS=TRUE
Q3 Q4: library part CMP-07173-000101-1, "MOSFET N-CH 50V 220MA SOT-23", Case/Package=SOT-23, Continuous Drain Current (ID)=220mA, Drain to Source Breakdown Voltage=50V, Drain to Source Resistance=3.5R, Gate to Source Voltage (Vgs)=20V, Input Capacitance=27pF, Max Operating Temperature=150°C, Max Power Dissipation=360mW, Min Operating Temperature=-55°C, On-State Resistance=6R, Package Quantity=1, Threshold Voltage=1.3V, Contact Plating=Tin, Current Rating=220mA, Drain to Source Voltage (Vdss)=50V, Dual Supply Voltage=50V, Element Configuration=Single, Fall Time=9ns, Height=0.93mm, Lead Free="Lead Free", Length=2.92mm, Mount="Surface Mount", Nominal Vgs=1.3V, Number of Elements=1, Number of Pins=3, Packaging="Tape and Reel", Power Dissipation=360mW, Radiation Hardening=No, Rds On Max=3.5R, REACH SVHC="No SVHC", Rise Time=9ns, Termination=SMD/SMT, Turn-Off Delay Time=20ns, Turn-On Delay Time=2.5ns, Voltage Rating (DC)=50V, Weight=0.03g, Width=1.3mm
R1 R6 R8 R10 R11 R16 R17 R18 R19: library part CMP-2001-04910-2, "RES Thick Film, 10kΩ, 5%, 0.125W, 200ppm/°C, 0805", Case Code (Imperial)=0805, Case Code (Metric)=2012, Max Operating Temperature=155°C, Min Operating Temperature=-55°C, Package Quantity=5000, Power Rating=125mW, Resistance=10kR, Temperature Coefficient=200ppm/°C, Tolerance=5%, Voltage Rating=150V, Case/Package=0805, Composition="Thick Film", Contact Plating=Tin, Depth=1.25mm, Height=0.45mm, Lead Free="Lead Free", Length=2mm, Military Standard=Not, Mount="Surface Mount", Packaging="Tape and Reel", Radiation Hardening=No, Termination=SMD/SMT, Voltage Rating (DC)=150V, Weight=0.000194oz, Width=1.25mm
R2 R13 R15: library part CMP-2001-00336-1, Manufacturer=Panasonic, Part Number=ERJ-6GEYJ102V
R3 R4: library part CMP-2001-00549-5, "Chip Resistor, 470 Ohm, +/- 1%, 0.125 W, -55 to 155 degC, 0805 (2012 Metric), RoHS, Tape and Reel", Manufacturer=Panasonic, Max Operating Temperature="155 degC", Min Operating Temperature="-55 degC", Package Quantity=1, Voltage Rating="150 V", ComponentLink1Description="Manufacturer URL", ComponentLink1URL=http://www.panasonic.com/, ComponentLink2Description=Datasheet, ComponentLink2URL=http://industrial.panasonic.com/cdbs/www-data/pdf/RDA0000/AOA0000C86.pdf, DatasheetVersion=04/2015, Height="0.6 mm", Length="2 mm", Mount="Surface Mount", Mounting Technology="Surface Mount", PackageDescription="2-Pin Surface Mount Device, Body 2 x 1.25 mm", PackageReference=0805, Packaging="Cut Tape", Pins=2, REACH SVHC=Yes, RoHSCompliant=true
R5 R7: library part CMP-1013-00078-2, Manufacturer=Panasonic, Part Number=ERJ-6GEYJ152V
R9: library part CMP-2001-00597-1, Manufacturer=Panasonic, Part Number=ERA6AEB152V
R12 R14: library part CMP-1013-00062-2, Manufacturer=Panasonic, Part Number=ERJ-6GEYJ331V
R20 R21 R24 R25 R26 R27 R28 R29: library part CMP-2001-00420-1, Manufacturer=Panasonic, Part Number=ERJ-6GEYJ472V
R22 R23: library part CMP-2001-00485-1, Manufacturer=Panasonic, Part Number=ERJ-P06J222V
R30 R31: library part CMP-2001-00427-1, Manufacturer=Panasonic, Part Number=ERJ-6GEYJ512V
SW1 SW2: library part CMP-1460-00001-1, "WS-TASV J-Bend SMD Tact Switch 6.0X3.8 mm", Manufacturer="Wuerth Elektronik", PartNumber=434113025826, ComponentLink1Description="Manufacturer URL", ComponentLink1URL=http://www.we-online.com, ComponentLink2Description=Datasheet, ComponentLink2URL=http://katalog.we-online.de/em/datasheet/434113025826.pdf, NoPins=02, PackageReference=434113025826
SW3 SW4 SW5: library part CMP-1464-00002-1, "WS-TASU J-Bend J-Bend SMD Tact Switch with boss design 4.7X3.5 mm side push", Manufacturer="Wuerth Elektronik", ComponentLink1Description="Manufacturer URL", ComponentLink1URL=http://www.we-online.com, ComponentLink2Description=Datasheet, ComponentLink2URL=http://katalog.we-online.de/em/datasheet/436353045816.pdf, PackageReference=436353045816, PartNumber=436353045816
U1: library part CMP-0133-00138-2, "IC LI-ION/LI-POLY CTRLR SOT23-5", Case/Package=SOT-23, Max Charge Current=500mA, Max Input Voltage=6V, Max Operating Temperature=85°C, Max Output Voltage=4.5V, Max Power Dissipation=1.54W, Min Operating Temperature=-40°C, Min Output Voltage=4.168V, Min Supply Voltage=3.75V, Output Current=10mA, Output Voltage=4.2V, Package Quantity=3000, Contact Plating=Tin, Height=1.3mm, Lead Free="Lead Free", Length=3.1mm, Max Output Current=500mA, Max Supply Voltage=6V, Mount="Surface Mount", Number of Cells=1, Number of Channels=1, Number of Outputs=1, Number of Pins=5, Packaging="Tape and Reel", Power Dissipation=1.54W, Radiation Hardening=No, REACH SVHC="No SVHC", Termination=SMD/SMT, Width=1.8mm
U2: library part CMP-0248-00015-2, "USB to Full-Handshake UART Interface Chip, UHCI/OHCI/EHCI Compatible, USB 2.0 Compatible, -40 to +85 degC, 20-Pin SSOP, Pb-Free, Tube", Manufacturer=FTDI, Code_JEDEC=MO-137-AD, ComponentLink1Description="Manufacturer URL", ComponentLink1URL=http://www.ftdichip.com/, ComponentLink2Description=Datasheet, ComponentLink2URL=http://www.ftdichip.com/Support/Documents/DataSheets/ICs/DS_FT231X.pdf, ComponentLink3Description="FT231X Product Page", ComponentLink3URL=www.ftdichip.com/Products/ICs/FT231X.html, DatasheetVersion="ver 1.2, Feb-2013", PackageDescription="20-Pin Small Outline Package, 8.6 x 3.9 mm Body, 0.635 mm Pitch", PackageReference=SSOP-20, PackageVersion=Feb-13, PartNumber=FT231XS-U, RevisionNote="DatasheetVersion updated to 1.2 Feb-2013"
U3: library part CMP-04892-000002-1, "IC I2C SW 8CH W/RESET 24TSSOP", Ambient Temperature Range High=+85°C, Ambient Temperature Range Low=-40°C, Manufacturer="Texas Instruments", Max Supply Voltage=5.5V, Min Supply Voltage=1.65V, Nominal Supply Current=2-50uA, Package=PW0024A, Temperature="-40°C to +85°C", Automotive=No, Category=IC, ComponentLink2Description=Datasheet, ComponentLink2URL=http://www.ti.com/lit/ds/symlink/tca9548a.pdf, Device Class L1="Integrated Circuits (ICs)", Device Class L2="Interface ICs", Device Class L3=Multiplexers, Digikey Description="IC I2C SW 8CH W/RESET 24TSSOP", Height=1.2mm, Interface=I2C,SMBus, Ipc Land Pattern Name=SOP65P640X120-24, Lead Free=Yes, Manufacturer Part Number=TCA9548APWR, Mouser Description="Low-Voltage 8-Channel I2C Switch With Reset 24-TSSOP -40 to 85", Mux Demux Ratio=1:8, Number Of Circuits=1, Octopart=https://octopart.com/tca9548apwr-texas+instruments-22266789, RoHS=TRUE, Standoff Height=0.05mm, Temperature Range High=+85°C, Temperature Range Low=-40°C
U4: library part CMP-12756-000035-1, "IC REG LINEAR 3.3V 600MA SOT25", Case/Package=SOT-23-5, Dropout Voltage=250mV, Max Input Voltage=6V, Max Operating Temperature=85°C, Max Output Current=600mA, Min Input Voltage=2.5V, Min Operating Temperature=-40°C, Output Voltage=3.3V, Package Quantity=1, Quiescent Current=55uA, Accuracy=1.5%, Height=1.3mm, Lead Free="Lead Free", Length=3.1mm, Mount="Surface Mount", Number of Outputs=1, Number of Pins=5, Number of Regulators=1, Output Current=600mA, Output Type=Fixed, Packaging="Tape and Reel", Polarity=Positive, Width=1.7mm
U5: library part CMP-05738-000003-1, "IC SENSOR OXIMETER/HEARTRATE", Manufacturer="Maxim Integrated", Max Junction Temp=+90°C, Max Supply Voltage=2V, Min Supply Voltage=1.7V, Operating Supply Current=600uA, Package=F143A5-1, Temperature="-40°C to +85°C", Temperature Range High=+85°C, Temperature Range Low=-40°C, Automotive=No, Category=IC, ComponentLink2Description=Datasheet, ComponentLink2URL=https://datasheets.maximintegrated.com/en/ds/MAX30102.pdf, Device Class L1=Sensors, Device Class L2=unset, Device Class L3=unset, Digikey Description="IC SENSOR OXIMETER/HEARTRATE", Footprint Url=https://pdfserv.maximintegrated.com/land_patterns/90-0602.PDF, Height=1.65mm, Lead Free=Yes, Manufacturer Part Number=MAX30102EFD+, Mouser Description="Pulse Oximeter/Heart Rate Sensor, Oesip", Octopart=https://octopart.com/max30102efd%2B-maxim+integrated-59568799, RoHS=TRUE, Sensor Output=I2C
U6: library part CMP-0758-00065-2, "Single Output Low Noise LDO, 150 mA, Fixed 1.8 V Output, 1.5% Tolerance, 2.2 to 16 V Input, Low IQ, 5-Pin SOT-23 (DBV), -40 to 125 degC, Green (RoHS & no Sb/Br), Tape and Reel", Manufacturer="Texas Instruments", Operating Temperature Range (degC)="-40 to 125", Accuracy (%)=1.5, ComponentLink1Description="Manufacturer URL", ComponentLink1URL=http://www.ti.com/, ComponentLink2Description=Datasheet, ComponentLink2URL=http://www.ti.com/lit/ds/symlink/lp2985-50.pdf, ComponentLink3Description="Package Specification", ComponentLink3URL=http://www.ti.com/litv/pdf/mpds018j, DatasheetVersion=SLVS522N, Fixed Output Options (V)=1.8, Iout (Max) (A)=0.15, Iq (Typ) (mA)=0.85, Mounting Technology="Surface Mount", Output Options="Fixed Output", PackageDescription="5-Pin Plastic Small Outline, Body 2.9 x 1.6 mm, Pitch 0.95 mm", PackageReference=DBV0005A, PackageVersion=4073253-4/L, Packing="Tape and Reel", PartNumber=LP2985-18DBVR, RoHS=TRUE, Vdo (Typ) (mV)=280, Vin (V)="2.2 to 16"
U7: library part CMP-2000-05060-2, "SENSOR OPT 560NM AMBIENT MODULE", Case/Package=SMD/SMT, Max Operating Temperature=85°C, Max Supply Voltage (DC)=3.6V, Min Operating Temperature=-30°C, Min Supply Voltage (DC)=2.4V, Mount="Surface Mount", Number of Pins=8, Output Type=Digital, Packaging="Tape and Reel", REACH SVHC="No SVHC", Sensing Distance=100mm, Wavelength=560nm
U8: library part CMP-0254-00308-1, "64 x 8, Serial, I2C Real-Time Clock, 5.0V, 8-Pin SO, 0 to 70 degC, Pb-Free", Code_IPC=SOIC127P600-8, Code_JEDEC=MS-012-AA, ComponentLink1Description="Manufacturer URL", ComponentLink1URL=http://www.maxim-ic.com, ComponentLink2Description=Datasheet, ComponentLink2URL=http://datasheets.maxim-ic.com/en/ds/DS1307.pdf, ComponentLink3Description="Package Specification", ComponentLink3URL=http://pdfserv.maxim-ic.com/package_dwgs/21-0041.PDF, DatasheetVersion=10-Feb-2008, PackageDescription="8-Pin Small-Outline IC, Narrow (0.15in), 1.27 mm Pitch, SOIC (N), Pb-Free", PackageReference=S8+2, PackageVersion="revC, 2010"
U9: "INVENSENSE   MPU-6050   GYRO / ACCEL, 6-AXIS, I2C, QFN-24", Case/Package=QFN, Manufacturer="TDK InvenSense", Max Operating Temperature=85°C, Min Operating Temperature=-40°C, Supplier Part Number 1=1428-1007-1-ND, Category="Inertial Measurement Units (IMUs)", ComponentLink1Description=https://datasheet.ciiva.com/1513/1788002-1513632.pdf?src-supplier=Element14, ComponentLink1URL=https://datasheet.ciiva.com/1513/1788002-1513632.pdf?src-supplier=Element14, ComponentLink2Description=https://datasheet.ciiva.com/22731/1788002-22731434.pdf?src-supplier=Element14, ComponentLink2URL=https://datasheet.ciiva.com/22731/1788002-22731434.pdf?src-supplier=Element14, Manufacturer Part Number=MPU-6050, Mount="Surface Mount", Output Type=I2C, Packaging="Tape and Reel", Pricing 1="1=7.55000, 5=6.62600, 10=5.96300, 25=5.30000, 50=4.90260, 100=4.24000, 500=3.97500, 1000=3.71000 (USD)", RoHS=Yes, Sensor Type="Accelerometer,Gyroscope,3 Axis", Stock 1=4311, Supplier 1=Digi-Key
X1: library part CMP-2000-05037-1, "Low Frequency Crystal, 32.768 KHz, -40 to 85 degC, 4-Pin SMD, RoHS, Tape and Reel", Case Height=2.5mm, Case Length=8mm, Case Width=3.8mm, Frequency=32.768kHz, Load Capacitance=12.5pF, Manufacturer=Abracon, Operating Temperature Range=-40Cto+85C, Package / Case=8mmx3.8mm, Package Description="4-Pin Surface Mount Device, Body 8 x 3.8 mm, Pitch 5.5 mm", Package Reference=ABS25, Tolerance=20PPM, Brand=ABRACON, Datasheet URL=https://datasheet.ciiva.com/7998/1700987-7998663.pdf, Datasheet Version=May-11, Dimensions=3.8mmWx8mmLx2.5mmH, ESR=50kOhms, Factory Pack Quantity=1000, Manufacturer URL=http://www.abracon.com/, Mounting Style=SMD/SMT, Packaging=Reel, Product Category=Crystals, RoHS=Details, Series=ABS25, Termination Style=SMD/SMT, Type=LowFrequencyCrystal

## Nets (pads, with @x,y where several pads share a name; then routed paths per layer and width w, separated by ;. In a path a pad name is that pad's centre, name@x,y a point inside that pad or via, vN(x,y) a via of type N, cw(c..) or ccw(c..) an arc to the next point about the centre after c; other vN are vias at no path point)
1307_SCL: R23.1 U3.11 U8.6
1307_SDA: R22.1 U3.10 U8.5
+3V3: C2.1 C5.1 C9.2 C12.2 C15.2 ESP32.2 LED2.2 P1.3 R1.2 R2.2 R5.2 R6.1 R7.2 R8.2 R12.1 R14.1 R15.2 R17.2 R18.2 R19.2 R20.2 R21.2 R22.2 R23.2 R25.2 R26.2 R27.2 R29.2 U3.24 U4.5 U5.9 U5.10 U6.1 U6.3 U7.5 U7.8 U8.8 U9.8 U9.13
+5_USB: C1.1 C3.1 C4.1 F1.1 J1.A4 J1.A9 J1.B4 J1.B9 J2.1 LED8.2 R10.2 R13.2 U1.3 U1.4 U4.1
APDS9960_SCL: R20.1 U3.7 U7.7
APDS9960_SDA: R21.1 U3.6 U7.1
"APDS_9960 INT": ESP32.10 U7.2
ESP32_RX: ESP32.34 U2.20
ESP32_TX: ESP32.35 U2.4
GND: BT1.3 C1.2 C2.2 C3.2 C4.2 C5.2 C6.2 C7.2 C8.1 C9.1 C10.1 C11.1 C12.1 C13.2 C14.1 C15.1 ESP32.1 ESP32.15 ESP32.38 ESP32.39 J1.A1 J1.A12 J1.B1 J1.B12 J2.2 LED1.1 LED2.4 LED3.1 LED5.1 LED7.1 P1.4 R9.1 R30.1 R31.1 SW1.1 SW2.1 SW3.4 SW4.4 SW5.4 U1.2 U2.6 U2.16 U3.1 U3.2 U3.12 U3.21 U4.2 U5.4 U5.12 U6.2 U6.4 U7.6 U8.4 U9.18
GPIO0: ESP32.25 Q2.3 R8.1 SW2.2
GPIO15: ESP32.23 LED2.1
GPIO36: ESP32.5
GPIO39: ESP32.4
MAX_INT: ESP32.11 U5.13
MAX_SCL: C10.2 C11.2 Q3.1 Q3.3 Q4.1 R24.2 R25.1 R28.2 U3.14 U5.11 U6.5
MAX_SCL_1V8: Q3.2 R24.1 U5.2
MAX_SDA: Q4.3 R29.1 U3.13
MAX_SDA_1V8: Q4.2 R28.1 U5.3
MPU6050_SCL: R26.1 U3.9 U9.24
MPU6050_SDA: R27.1 U3.8 U9.23
MPU_INT: ESP32.12 U9.12
NetBT1_1: BT1.1 U8.3
NetC6_1: C6.1 C7.1 F1.2 U2.15
NetC8_2: C8.2 U2.3 U2.13 U2.14
NetC13_1: C13.1 U9.20
NetC14_2: C14.2 U9.10
NetJ1_A5: J1.A5 R30.2
NetJ1_A6: J1.A6 J1.B6 U2.11
NetJ1_A7: J1.A7 J1.B7 U2.12
NetJ1_B5: J1.B5 R31.2
NetLED1_2: LED1.2 R2.1
NetLED3_2: LED3.2 R4.1
NetLED4_2: LED4.2 R12.2
NetLED5_2: LED5.2 R13.1
NetLED6_2: LED6.2 R14.2
NetLED7_2: LED7.2 R15.1
NetLED8_1: LED8.1 R3.1
NetQ1_1: Q1.1 R11.1
NetQ1_2: Q1.2 R16.2 U2.2
NetQ2_1: Q2.1 R16.1
NetQ2_2: Q2.2 R11.2 U2.1
NetR3_2: R3.2 R4.2 U1.1
NetR6_2: R6.2 U3.3
NetR9_2: R9.2 U1.5
NetR10_1: R10.1 U4.3
NetU7_3: U7.3 U7.4
NetU8_1: U8.1 X1.1
NetU8_2: U8.2 X1.4
OLED_SCL: P1.2 U3.5
OLED_SDA: P1.1 U3.4
"PAGE DOWN": ESP32.16 R18.1 SW4.3
"PAGE IN": ESP32.13 R19.1 SW5.3
"PAGE UP": ESP32.14 R17.1 SW3.3
RESET: ESP32.3 Q1.3 R1.1 SW1.2
RX_LED: LED4.1 U2.17
SCL: ESP32.36 R5.1 U3.22
SDA: ESP32.33 R7.1 U3.23
TX_LED: LED6.1 U2.10
U2_RXD: ESP32.27
U2_TXD: ESP32.28
VSPI_CS: ESP32.29
VSPI_MISO: ESP32.31
VSPI_MOSI: ESP32.37
VSPI_SCK: ESP32.30
pads on no net: BT1.2 ESP32.6 ESP32.7 ESP32.8 ESP32.9 ESP32.17 ESP32.18 ESP32.19 ESP32.20 ESP32.21 ESP32.22 ESP32.24 ESP32.26 ESP32.32 J1.1 J1.2 J1.3 J1.4 J1.A8 J1.B8 LED2.3 SW3. SW3.1 SW3.2 SW4. SW4.1 SW4.2 SW5. SW5.1 SW5.2 U2.5 U2.7 U2.8 U2.9 U2.18 U2.19 U3.15 U3.16 U3.17 U3.18 U3.19 U3.20 U4.4 U5.1 U5.5 U5.6 U5.7 U5.8 U5.14 U8.7 U9.1 U9.2 U9.3 U9.4 U9.5 U9.6 U9.7 U9.9 U9.11 U9.14 U9.15 U9.16 U9.17 U9.19 U9.21 U9.22 X1.2 X1.3